# Altium PCB Embarcado.PcbDoc (part 1 of 2)
Units mm, origin at the board's own origin, x right, y up, seen from the top; angles counter-clockwise.
Board outline 64.52 x 71.25 mm, 2 copper layers (Top Layer, Bottom Layer); 37 components, 40 nets, 204 pads, 24 vias.
Unrouted connection lines stored in the file: 4.
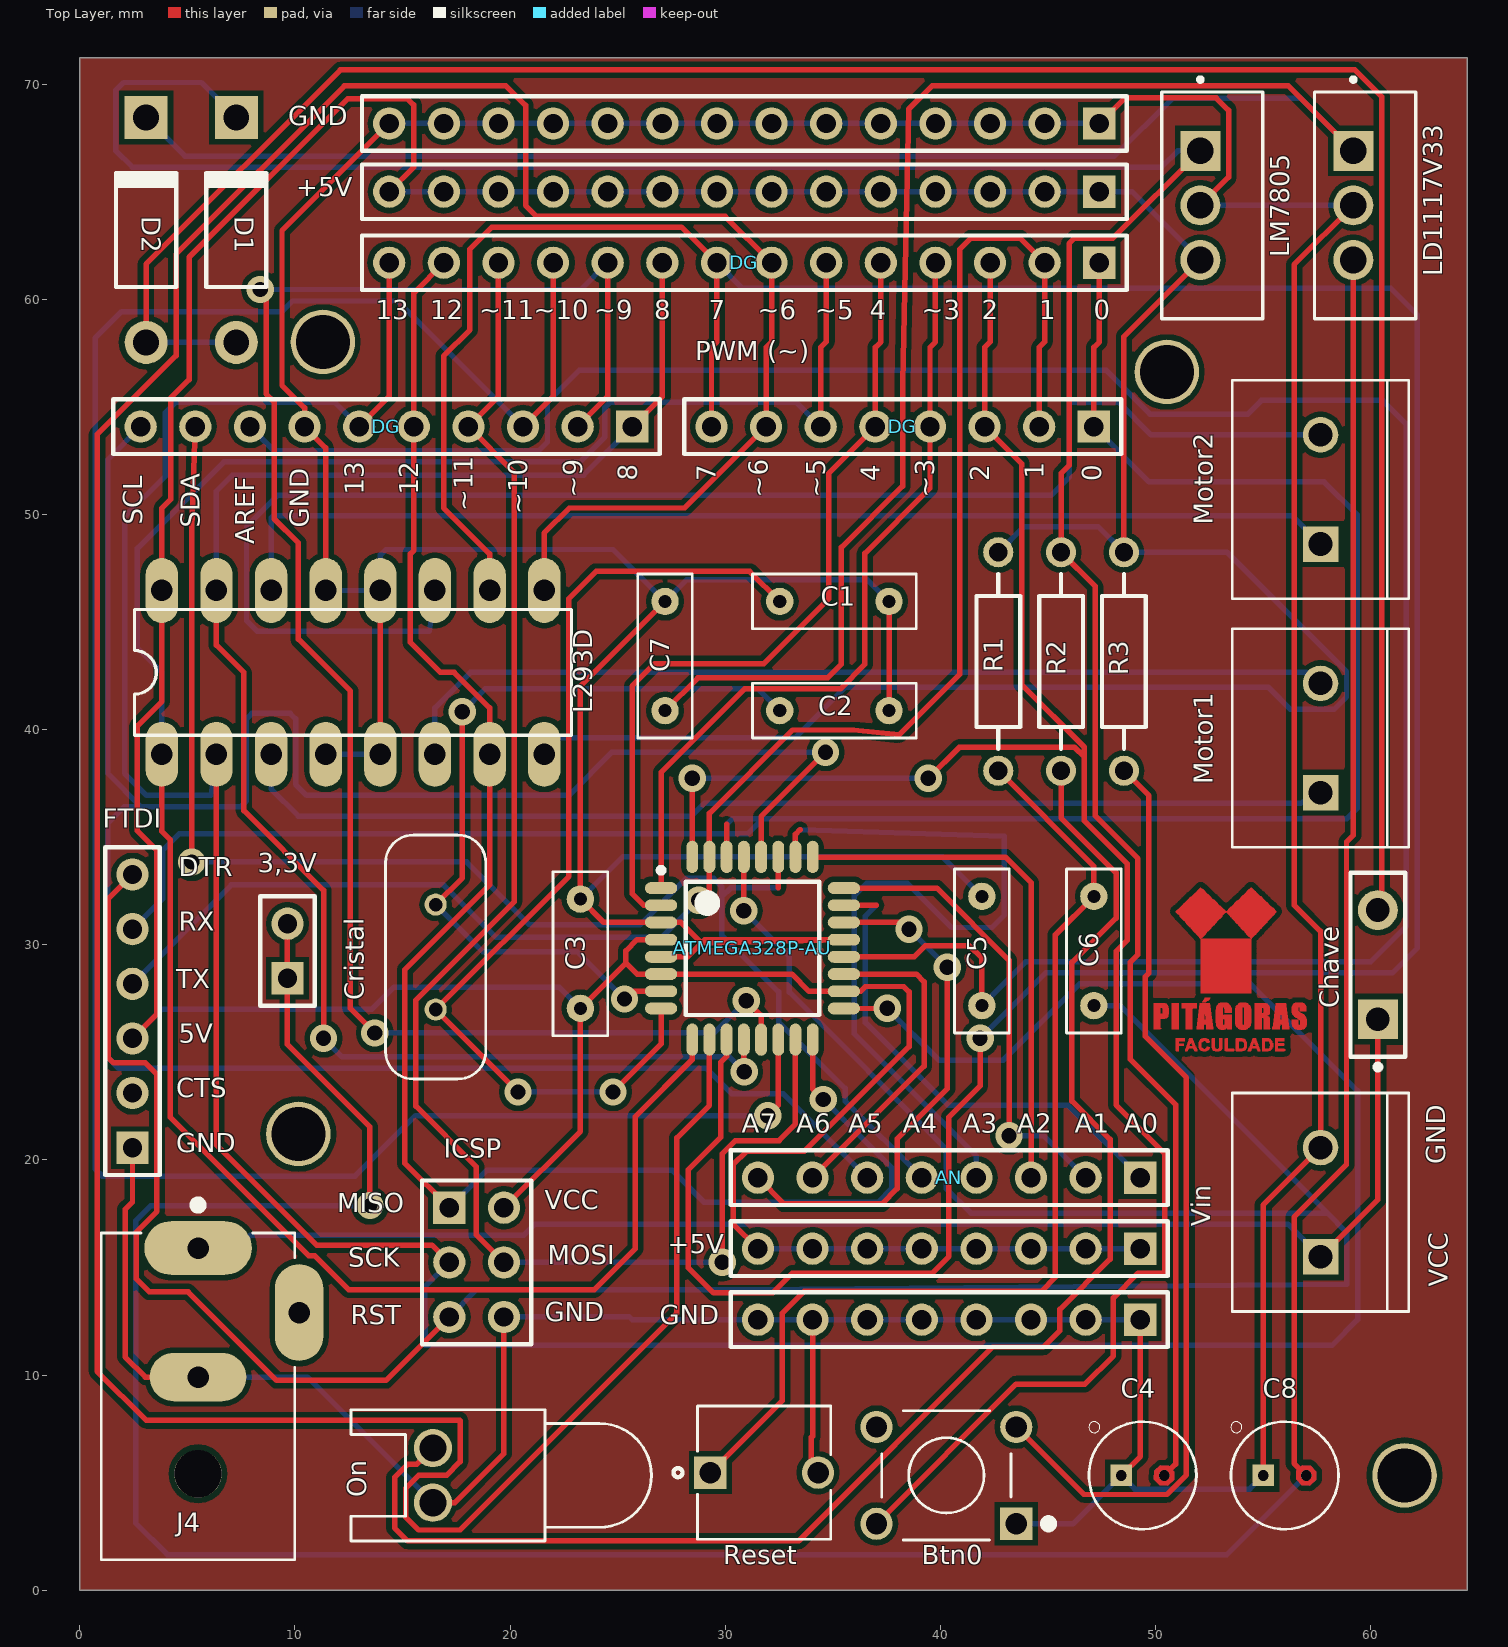
[diagram p0: Top Layer view]
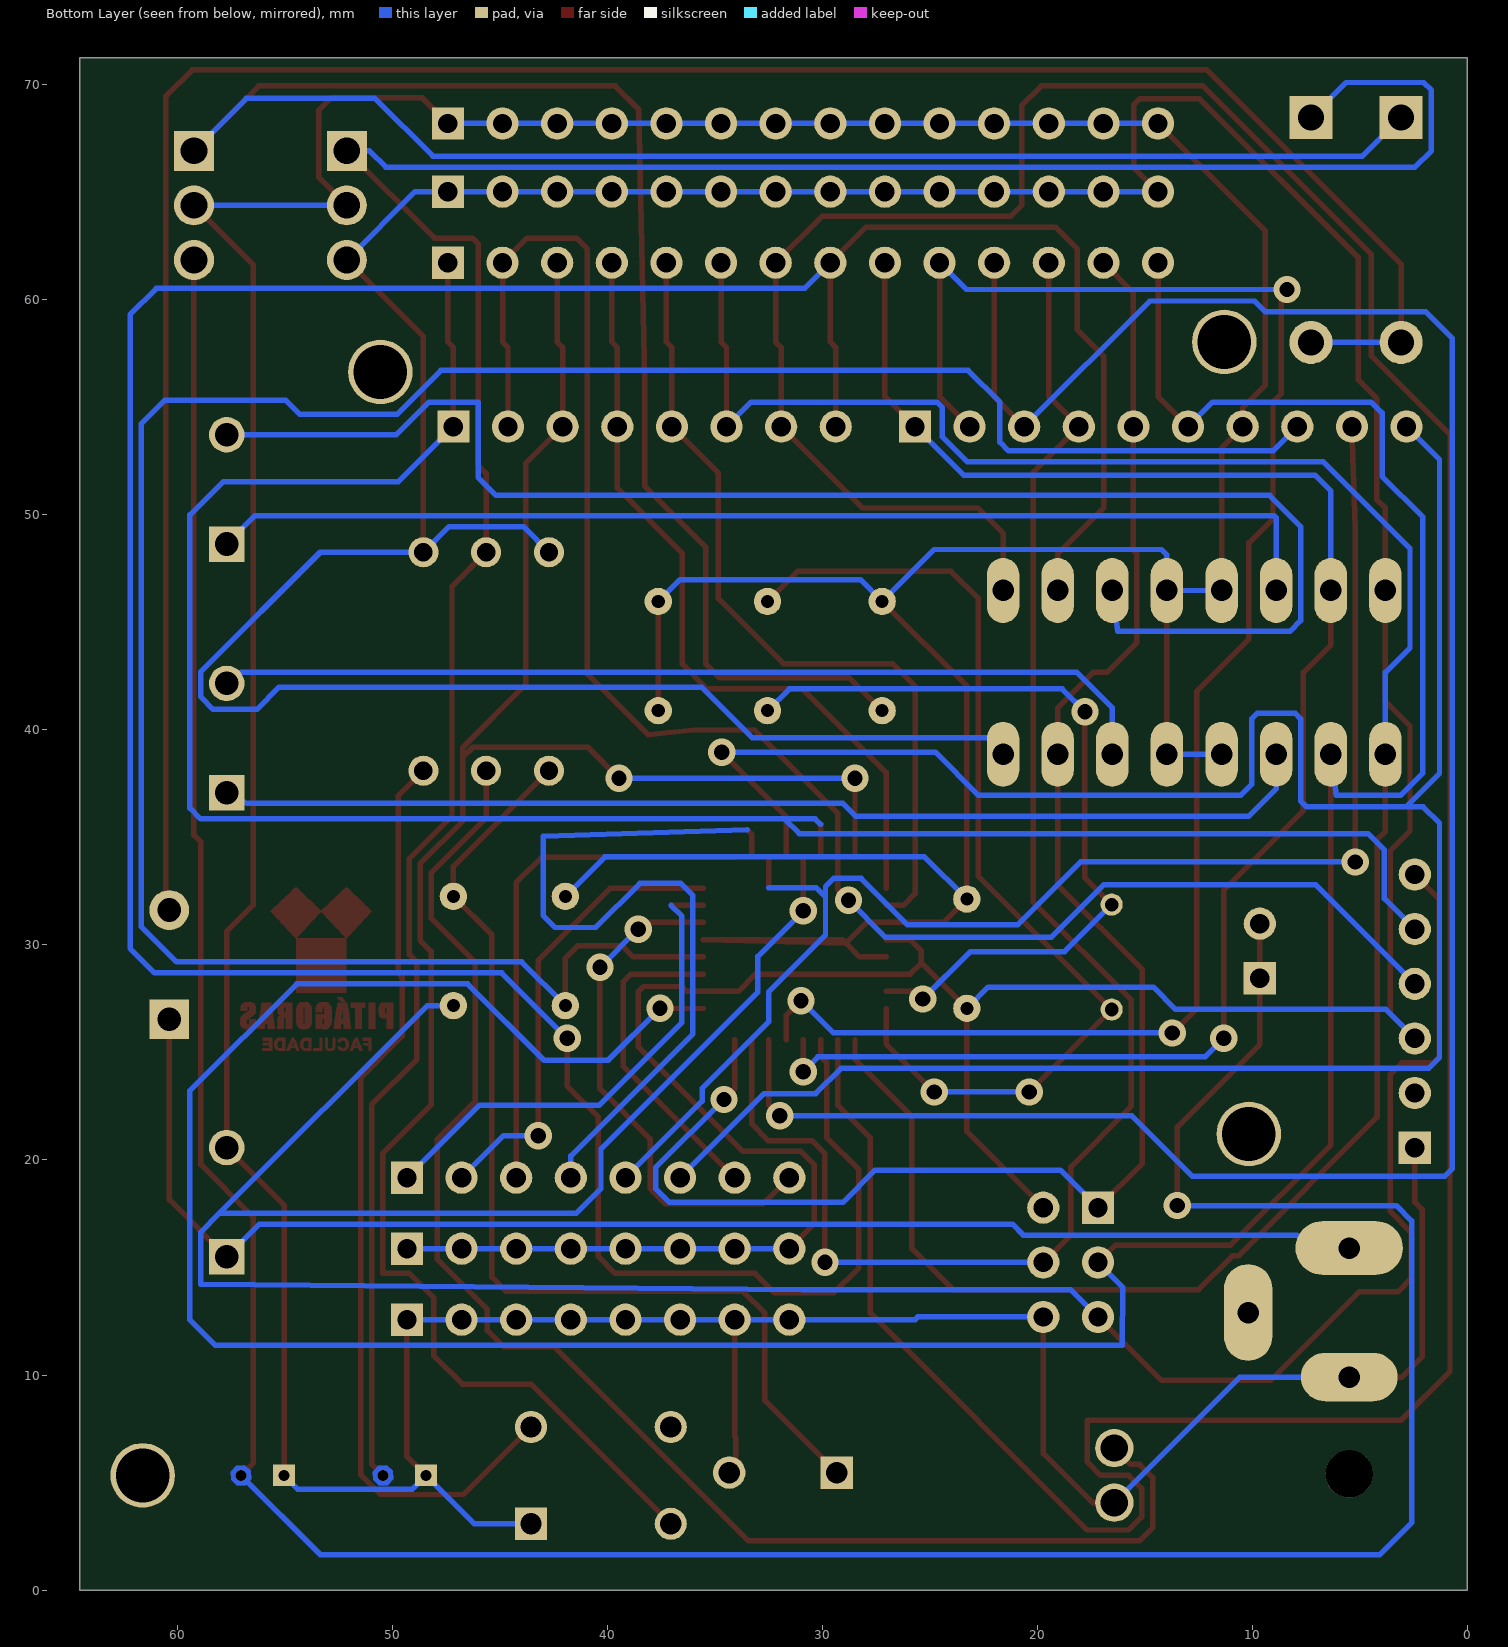
[diagram p1: Bottom Layer view, seen from below]

## Layer stack, top to bottom
Top Solder: solder mask 0.0102, Solder Resist, Dk 3.5
Top Layer: signal copper 0.0356
Dielectric 1: dielectric 0.32, FR-4, Dk 4.8
Bottom Layer: signal copper 0.0356
Bottom Solder: solder mask 0.0102, Solder Resist, Dk 3.5

## Board outline
0,0 64.516,0 64.516,71.247 0,71.247

## Design rules (kind name [scope] priority, off if disabled: settings)
Clearance [All] p1: gap=0.254 ignorepadtopadclearanceinfootprint=FALSE except(0: Arc-Hole Track-Hole SMDPad-Hole THPad-Hole Via-Hole Fill-Hole Poly-Hole Region-Hole Text-Hole)
PolygonConnect [All] p1: connectstyle=Relief reliefconductorwidth=0.254 reliefentries=4 polygonreliefangle="90 Angle" airgapwidth=0.254
RoomDefinition Embarcado [InComponentClass('Embarcado')] p1: confinementstyle=ConfineIn formatcopy=TRUE lockcomponents=FALSE outline 0.032,0.127 64.548,0.127 64.548,71.374 0.032,71.374
RoutingVias [All] p1: holewidth=0.711 width=1.27 viastyle="Through Hole" minholewidth=0.711 minwidth=1.27 maxholewidth=0.711 maxwidth=1.27
SolderMaskExpansion [All] p1: expansion=0.102
Width [All] p1: maxlimit=0.254 minlimit=0.254 preferedwidth=0.254
30 further rules are at their usual default settings.

## Components (designator, comment, footprint, x,y, rotation, side; value= is the part's Value field where it differs from the comment)
3,3V "" HDR1X2 9.652,28.448 r90 top
+5V "+5V" HDR1X8 49.308,15.875 r180 top
+5V "+5V" HDR1X14 47.403,65.024 r180 top
AN "Analógico" HDR1X8 49.308,19.177 r180 top
ATMEGA328P-AU "PROCESSADOR" TQFP80P900X900X120-32N 31.274,29.845 r0 top (schematic designator U?)
Btn0 "" SW_FSM8JH 40.291,5.334 r180 top
C1 "" LEADED_DECOUPLING_CAP(.1) 35.084,45.974 r0 top
C2 "" LEADED_DECOUPLING_CAP(.1) 35.084,40.894 r0 top
C3 "" LEADED_DECOUPLING_CAP(.1) 23.273,29.591 r90 top
C4 "" CAPPRD200W50D500H1100B_ECA-1HM220(Primary) 49.419,5.334 r0 top
C5 "" LEADED_DECOUPLING_CAP(.1) 41.942,29.718 r90 top
C6 "" LEADED_DECOUPLING_CAP(.1) 47.149,29.718 r90 top
C7 "" LEADED_DECOUPLING_CAP(.1) 27.21,43.434 r90 top
C8 "" CAPPRD200W50D500H1100B_ECA-1HM220(Primary) 56.023,5.334 r0 top
Chave "" SPST-2 60.357,29.083 r90 top (schematic designator Key)
Cristal "ECS-60-32-4XDN" XTAL_ECS-60-32-4XDN 16.542,29.437 r90 top (schematic designator Crystal)
D1 "Diode 1N4007" DO-41 7.271,63.246 r90 top
D2 "Diode 1N4007" DO-41 3.08,63.246 r90 top
DG "DG" HDR1X14 47.403,61.722 r180 top
DG "Digitais" HDR1X8 47.149,54.102 r180 top
DG "Digitais" HDR1X10 25.686,54.102 r180 top
FTDI "" HDR1X6 2.445,20.574 r90 top
GND "GND" HDR1X14 47.403,68.199 r180 top
GND "GND" HDR1X8 49.308,12.573 r180 top
ICSP "" HDR2X3_CEN 17.177,17.78 r270 top
J4 "PJ-058BH" CUI_PJ-058BH 5.493,15.906 r270 top
L293D "" DIL16 12.7,42.672 r0 top
LD1117V33 "" TO254P1054X470X2600-3 59.214,66.929 r270 top
LM7805 "LM7805CT/NOPB" TO254P1054X470X2600-3 52.102,66.929 r270 top
Motor1 "282837\-2" TE_282837-2 57.69,39.624 r90 top
Motor2 "282837\-2" TE_282837-2 57.69,51.181 r90 top
On "LED" LED-0 16.415,5.334 r90 top
R1 "" AXIAL-0.4 42.704,43.18 r90 top value=10K
R2 "" AXIAL-0.4 45.625,43.18 r90 top value=500R
R3 "" AXIAL-0.4 48.546,43.18 r90 top value=1K
Reset "4-1437565-0" SW_4-1437565-0 31.82,5.461 r0 top (schematic designator RESET)
Vin "282837\-2" TE_282837-2 57.69,18.034 r90 top

## Footprints (in the part's own frame and the unit in brackets; to place one, negate y for a bottom-side part, rotate by r counter-clockwise, add the part's x,y. Pads: shape width x height; smd on the part's side, far side on the other; paste and mask are expansions set on the pad)
AXIAL-0.4 [mm] "Axial Device, Thru-Hole; 2 Leads; 0.4 in Pin Spacing"
  round 1.4 hole 0.85: 1(-5.08,0) 2(5.08,0)
  silkscreen extent -4.06,-1.02 4.06,1.02
CAPPRD200W50D500H1100B_ECA-1HM220(Primary) [mm]
  rect 1.008x1.008 hole 0.5: NEG(-1,0)
  round 0.5 hole 0.5: POS(1,0)
  Top Layer region: 1.474,0.172 1.213,0.457 0.828,0.474 0.543,0.213 0.526,-0.172 0.787,-0.457 1.172,-0.474 1.457,-0.213
  Bottom Layer region: 1.474,0.172 1.213,0.457 0.828,0.474 0.543,0.213 0.526,-0.172 0.787,-0.457 1.172,-0.474 1.457,-0.213
  Multi-Layer region: 1.474,0.172 1.213,0.457 0.828,0.474 0.543,0.213 0.526,-0.172 0.787,-0.457 1.172,-0.474 1.457,-0.213
  silkscreen extent -2.5,-2.5 2.5,2.5
CUI_PJ-058BH [mm]
  oval 2.5x5 hole 1: 1(0,0)
  oval 2.25x4.5 hole 1: 2(6,0)
  oval 4.5x2.25 hole 1: 3(3,4.7)
  round 2.2 hole 2.2 unplated: None(10.5,0)
  silkscreen extent -2.2,-4.5 14.5,4.5
DIL16 [mm]
  oval 1.508x3.016 hole 1: 1(-8.89,-3.81) 2(-6.35,-3.81) 3(-3.81,-3.81) 4(-1.27,-3.81) 5(1.27,-3.81) 6(3.81,-3.81) 7(6.35,-3.81) 8(8.89,-3.81) 9(8.89,3.81) 10(6.35,3.81) 11(3.81,3.81) 12(1.27,3.81) 13(-1.27,3.81) 14(-3.81,3.81) 15(-6.35,3.81) 16(-8.89,3.81)
  silkscreen extent -10.16,-2.92 10.16,2.92
DO-41 [mm] "Diode, Axial; Body 5.2 x 2.7 mm (LxDia. max), Lead Dia. 0.86 mm (max)"
  round 2 hole 1.2: 1(-5.23,0)
  rect 2x2 hole 1.2: 2(5.23,0)
  silkscreen extent -2.65,-1.4 2.75,1.4
HDR1X2 [mm] "Connector; Header; 2 Position"
  rect 1.5x1.5 hole 0.9: 1(0,0)
  round 1.5 hole 0.9: 2(2.54,0)
  silkscreen extent -1.27,-1.27 3.81,1.27
HDR1X6 [mm] "Connector; Header; 6 Position"
  rect 1.5x1.5 hole 0.9: 1(0,0)
  round 1.5 hole 0.9: 2(2.54,0) 3(5.08,0) 4(7.62,0) 5(10.16,0) 6(12.7,0)
  silkscreen extent -1.27,-1.27 13.97,1.27
HDR1X8 [mm] "Connector; Header; 8 Position"
  rect 1.5x1.5 hole 0.9: 1(0,0)
  round 1.5 hole 0.9: 2(2.54,0) 3(5.08,0) 4(7.62,0) 5(10.16,0) 6(12.7,0) 7(15.24,0) 8(17.78,0)
  silkscreen extent -1.27,-1.27 19.05,1.27
HDR1X10 [mm] "Connector; Header; 10 Position"
  rect 1.5x1.5 hole 0.9: 1(0,0)
  round 1.5 hole 0.9: 2(2.54,0) 3(5.08,0) 4(7.62,0) 5(10.16,0) 6(12.7,0) 7(15.24,0) 8(17.78,0) 9(20.32,0) 10(22.86,0)
  silkscreen extent -1.27,-1.27 24.13,1.27
HDR1X14 [mm] "Connector; Header; 14 Position"
  rect 1.5x1.5 hole 0.9: 1(0,0)
  round 1.5 hole 0.9: 2(2.54,0) 3(5.08,0) 4(7.62,0) 5(10.16,0) 6(12.7,0) 7(15.24,0) 8(17.78,0) 9(20.32,0) 10(22.86,0) 11(25.4,0) 12(27.94,0) 13(30.48,0) 14(33.02,0)
  silkscreen extent -1.27,-1.27 34.29,1.27
HDR2X3_CEN [mm] "Connector; Header; 3x2 Position"
  rect 1.5x1.5 hole 0.9: 1(0,0)
  round 1.5 hole 0.9: 2(2.54,0) 3(5.08,0) 4(0,2.54) 5(2.54,2.54) 6(5.08,2.54)
  silkscreen extent -1.27,-1.27 6.35,3.81
LEADED_DECOUPLING_CAP(.1) [mil]
  round 50 hole 24: 1(-100,0) 2(100,0)
  silkscreen extent -150,-50 150,50
LED-0 [mil] "LED; 2 Leads"
  round 70 hole 50: 1(50,0) 2(-50,0)
  silkscreen extent -120,-400 120,150
SPST-2 [mm] "Switch; 2 Leads"
  rect 1.85x1.85 hole 1.1: 1(-2.54,0)
  round 1.85 hole 1.1: 2(2.54,0)
  silkscreen extent -4.89,-1.27 4.28,1.27
SW_4-1437565-0 [mm]
  rect 1.508x1.508 hole 1: 1(-2.502,0)
  round 1.508 hole 1: 2(2.502,0)
  silkscreen extent -4.22,-3.1 3.1,3.1
SW_FSM8JH [mm]
  rect 1.498x1.498 hole 0.99: 1(-3.25,2.25)
  round 1.498 hole 0.99: 2(-3.25,-2.25) 3(3.25,2.25) 4(3.25,-2.25)
  silkscreen extent -4.95,-3 3,3
TE_282837-2 [mm]
  rect 1.65x1.65 hole 1.1: 1(-2.54,0)
  round 1.65 hole 1.1: 2(2.54,0)
  silkscreen extent -5.08,-4.1 5.08,4.1
TO254P1054X470X2600-3 [mm]
  rect 1.86x1.86 hole 1.24: 1(0,0)
  round 1.86 hole 1.24: 2(2.54,0) 3(5.08,0)
  silkscreen extent -3.41,-1.8 7.81,2.9
TQFP80P900X900X120-32N [mm] "TQFP, 32-Leads, Body 7,00x7,00mm, Pitch 0,80mm, IPC Medium Density"
  oval 1.5x0.55 smd: 1(-4.25,2.8) 2(-4.25,2) 3(-4.25,1.2) 4(-4.25,0.4) 5(-4.25,-0.4) 6(-4.25,-1.2) 7(-4.25,-2) 8(-4.25,-2.8) 17(4.25,-2.8) 18(4.25,-2) 19(4.25,-1.2) 20(4.25,-0.4) 21(4.25,0.4) 22(4.25,1.2) 23(4.25,2) 24(4.25,2.8)
  oval 0.55x1.5 smd: 9(-2.8,-4.25) 10(-2,-4.25) 11(-1.2,-4.25) 12(-0.4,-4.25) 13(0.4,-4.25) 14(1.2,-4.25) 15(2,-4.25) 16(2.8,-4.25) 25(2.8,4.25) 26(2,4.25) 27(1.2,4.25) 28(0.4,4.25) 29(-0.4,4.25) 30(-1.2,4.25) 31(-2,4.25) 32(-2.8,4.25)
  silkscreen extent -4.37,-3.1 3.1,3.75, body extent -3.5,-3.5 3.5,3.5, height 1.2
XTAL_ECS-60-32-4XDN [mm]
  round 1.03 hole 0.63: 1(-2.44,0) 2(2.44,0)
  silkscreen extent -5.68,-2.33 5.68,2.33

## Part data
3,3V: library part "Header 2", "Header, 2-Pin", LatestRevisionDate=17-Jul-2002, LatestRevisionNote="Re-released for DXP Platform.", Publisher="Altium Limited"
+5V AN DG GND: library part "Header 8", "Header, 8-Pin", LatestRevisionDate=17-Jul-2002, LatestRevisionNote="Re-released for DXP Platform.", Publisher="Altium Limited"
+5V DG GND: library part "Header 14", "Header, 14-Pin", LatestRevisionDate=17-Jul-2002, LatestRevisionNote="Re-released for DXP Platform.", Publisher="Altium Limited"
ATMEGA328P-AU: library part ATMEGA328P-AU, "ATMEGA328P-AU, 8 bit AVR Microcontrolador 20MHz 1kB, 32kB Flash, 2kB RAM. I2C 32-Pin TQFP", Datasheet URL=http://ww1.microchip.com/downloads/en/devicedoc/atmel-42735-8-bit-avr-microcontroller-atmega328-328p_datasheet.pdf
Btn0: library part FSM8JH, "Switch, Pushbutton, Tactile, SPST, Thru Hole, Vertical, 6MM, Black", Package=None, Availability=Unavailable, MF="TE Connectivity / Alcoswitch", MP=FSM8JH, Price=None, SnapEDA_Link=https://www.snapeda.com/parts/FSM8JH/TE%20Connectivity%20/%20Alcoswitch/view-part/?ref=snap
C1 C2 C3 C5 C6 C7: library part C320C104M1U5TA, "Capacitor; Ceramic; Cap .100uF; Tol 20%; Radial; Vol-Rtg 100V", Package="Radial Kemet", Availability=Unavailable, MF=KEMET, MP=C320C104M1U5TA, Price=None, SnapEDA_Link=https://www.snapeda.com/parts/C320C104M1U5TA/KEMET/view-part/?ref=snap
C4 C8: library part ECA-1HM220, "Cap Aluminum 22uF 50V 20% _5 X 11mm_ Radial Aluminum Cylindrical Can 2mm 100mA 2000 hr 85°C Bulk", Package=None, Availability=Unavailable, MF=Panasonic, MP=ECA1HM220, Price=None, SnapEDA_Link=https://www.snapeda.com/parts/ECA1HM220/Panasonic/view-part/?ref=snap
Chave: library part SW-SPST, "Single-Pole, Single-Throw Switch", LatestRevisionDate=17-Jul-2002, LatestRevisionNote="Re-released for DXP Platform.", PackageDescription="Switch; 2 Leads", PackageReference=SPST-2, Published=24-Mar-1999, Publisher="Altium Limited"
Cristal: "Crystal 6.0000mhz 32pf t/h", Package="HC-49/US ECS International", Availability=Unavailable, MF="ECS Inc.", MP=ECS-60-32-4XDN, Price=None, SnapEDA_Link=https://www.snapeda.com/parts/ECS-60-32-4XDN/ECS%20Inc./view-part/?ref=snap
D1 D2: "1 Amp General Purpose Rectifier", Code_JEDEC=DO-204-AL, ComponentLink1Description="Manufacturer Link", ComponentLink1URL=http://www.fairchildsemi.com/, ComponentLink2Description=Datasheet, ComponentLink2URL=http://www.fairchildsemi.com/ds/1N%2F1N4001.pdf, DatasheetVersion=1998, LatestRevisionDate=17-Jul-2002, LatestRevisionNote="Re-released for DXP Platform.", PackageDescription="Diode, Axial; Body 5.2 x 2.7 mm (LxDia. max), Lead Dia. 0.86 mm (max)", PackageReference=DO-41, PackageVersion=Aug-1999, Published=8-Jun-2000, Publisher="Altium Limited"
DG: library part "Header 10", "Header, 10-Pin", LatestRevisionDate=17-Jul-2002, LatestRevisionNote="Re-released for DXP Platform.", Publisher="Altium Limited"
FTDI: library part "Header 6", "Header, 6-Pin", LatestRevisionDate=17-Jul-2002, LatestRevisionNote="Re-released for DXP Platform.", Publisher="Altium Limited"
ICSP: library part "Header 3X2A", "Header, 3-Pin, Dual row", LatestRevisionDate=17-Jul-2002, LatestRevisionNote="Re-released for DXP Platform.", Publisher="Altium Limited"
L293D: library part L293D, Package="Package Analog Devices", Availability=Unavailable, MF=STMicroelectronics, MP=L293D, Price=None, SnapEDA_Link=https://www.snapeda.com/parts/L293D/STMicroelectronics/view-part/?ref=snap
LD1117V33: library part LM7805CT/NOPB, Package="TO-220 ON Semiconductor", Availability=Unavailable, MF="ON Semiconductor", MP=LM7805CT, Price=None, SnapEDA_Link=https://www.snapeda.com/parts/LM7805CT/ON%20Semiconductor/view-part/?ref=snap
LM7805: Package="TO-220 ON Semiconductor", Availability=Unavailable, MF="ON Semiconductor", MP=LM7805CT, Price=None, SnapEDA_Link=https://www.snapeda.com/parts/LM7805CT/ON%20Semiconductor/view-part/?ref=snap
Motor1 Motor2 Vin: library part 282837-2, "Connector Terminal Blocks Receptacle 2 Position 5.08mm Solder Straight Thru-Hole 13.5A/Contact", Package=None, Availability=Unavailable, EU_RoHS_Compliance="Compliant with Exemptions", Link=http://www.te.com/usa-en/product-282837-2.html, MF="TE Connectivity", MP=282837-2, Price=None, SnapEDA_Link=https://www.snapeda.com/parts/282837-2/TE%20Connectivity%20AMP%20Connectors/view-part/?ref=snap
On: library part LED0, "Typical INFRARED GaAs LED", LatestRevisionDate=08-Jul-2005, LatestRevisionNote="Mech Layer 1 removed.", PackageDescription="LED; 2 Leads", PackageReference=LED-0, Published=8-Jun-2000, Publisher="Altium Limited"
R1 R2 R3: library part Res2, "Resistor", LatestRevisionDate=17-Jul-2002, LatestRevisionNote="Re-released for DXP Platform.", PackageDescription="Axial Device, Thru-Hole; 2 Leads; 0.4 in Pin Spacing", PackageReference=AXIAL-0.4, Published=8-Jun-2000, Publisher="Altium Limited"
Reset: "features, series, Tactile / Jog, circuitry, voltage, illumination, operation, tactile, style, Pushbutton, Industrial ...", Package=None, Availability=Unavailable, MF="TE Connectivity", MP=FSM4JRT, Price=None, SnapEDA_Link=https://www.snapeda.com/parts/FSM4JRT/TE%20Connectivity%20ALCOSWITCH%20Switches/view-part/?ref=snap

## Free pads (board coordinates)
  round 3 hole 2.5: 4(10.16,21.209) 7(61.595,5.334) 8(50.546,56.642) 9(11.303,58.039)

## Via types
v1: diameter 1.27, hole 0.711, Top Layer to Bottom Layer, 24 vias

## Nets (pads, with @x,y where several pads share a name; then routed paths per layer and width w, separated by ;. In a path a pad name is that pad's centre, name@x,y a point inside that pad or via, vN(x,y) a via of type N, cw(c..) or ccw(c..) an arc to the next point about the centre after c; other vN are vias at no path point)
+3,3: 3,3V.1 3,3V.2 C8.POS LD1117V33.3 | length 154.4
  Top Layer w0.254: 9.652,30.988 9.652,28.448 9.652,25.375 13.487,21.539 v1(13.487,17.882) ; C8.POS@57.023,5.334 56.464,5.893 56.464,17.348 58.896,19.78 58.896,34.791 59.214,35.109 LD1117V33.3@59.214,61.849
  Bottom Layer w0.254: v1(13.487,17.882) 3.302,17.882 2.591,17.17 2.591,3.124 4.064,1.651 53.34,1.651 C8.POS@57.023,5.334
+5: +5V.1 +5V.2 +5V.3 +5V.4 +5V.5 +5V.6 +5V.7 +5V.8 +5V.9 +5V.10 +5V.11 +5V.12 +5V.13 +5V.14 ATMEGA328P-AU.4 ATMEGA328P-AU.6 ATMEGA328P-AU.18 C3.1 FTDI.3 ICSP.4 L293D.8 L293D.16 LM7805.3 R1.2 R3.2 | length 258.2
  Top Layer w0.254: FTDI.3@2.445,25.654 3.581,26.79 3.581,34.392 2.667,35.306 2.667,40.183 3.81,41.326 L293D.16@3.81,46.482 3.81,50.317 4.216,50.724 4.216,55.426 5.081,56.291 5.081,61.977 12.446,69.342 15.24,69.342 15.519,69.063 15.519,66.16 +5V.14@14.383,65.024 ; ICSP.4@19.717,17.78 23.273,21.336 C3.1@23.273,27.051 25.387,29.166 ; ATMEGA328P-AU.4@27.024,30.245 25.908,30.245 25.387,29.724 25.387,29.166 ; +5V.8@31.528,15.875 30.378,17.025 30.378,19.787 30.988,20.396 33.68,20.396 38.557,25.273 38.557,27.813 38.303,28.067 36.525,28.067 36.303,27.845 ATMEGA328P-AU.18@35.524,27.845 33.902,27.845 33.102,28.645 ATMEGA328P-AU.6@27.024,28.645 25.908,28.645 25.387,29.166 ; R3.2@48.546,48.26 48.546,58.293 LM7805.3@52.102,61.849
  Bottom Layer w0.254: FTDI.3@2.445,25.654 3.791,27 13.564,27 14.605,28.042 22.282,28.042 C3.1@23.273,27.051 ; +5V.14@14.383,65.024 +5V.13@16.923,65.024 +5V.12@19.463,65.024 +5V.11@22.003,65.024 +5V.10@24.543,65.024 +5V.9@27.083,65.024 +5V.8@29.623,65.024 +5V.7@32.163,65.024 +5V.6@34.703,65.024 +5V.5@37.243,65.024 +5V.4@39.783,65.024 +5V.3@42.323,65.024 +5V.2@44.863,65.024 +5V.1@47.403,65.024 48.927,65.024 LM7805.3@52.102,61.849 ; L293D.8@21.59,38.862 21.59,39.624 33.249,39.624 35.611,41.986 55.258,41.986 56.286,40.958 58.325,40.958 58.896,41.529 58.896,42.704 53.34,48.26 R3.2@48.546,48.26 47.352,49.454 43.898,49.454 R1.2@42.704,48.26 ; +5V.8@31.528,15.875 +5V.7@34.068,15.875 +5V.6@36.608,15.875 +5V.5@39.148,15.875 +5V.4@41.688,15.875 +5V.3@44.228,15.875 +5V.2@46.768,15.875 +5V.1@49.308,15.875
GND: ATMEGA328P-AU.3 ATMEGA328P-AU.5 ATMEGA328P-AU.21 Btn0.1 C1.2 C2.2 C3.2 C4.NEG C5.2 C7.2 C8.NEG DG.7@10.446,54.102 FTDI.1 GND.1 GND.2 GND.3 GND.4 GND.5 GND.6 GND.7 GND.8 GND.9 GND.10 GND.11 GND.12 GND.13 GND.14 ICSP.6 J4.2 L293D.4 L293D.5 L293D.12 L293D.13 LD1117V33.2 LM7805.2 On.2 Reset.2 Vin.2 | length 336
  Top Layer w0.254: FTDI.1@2.445,20.574 2.445,18.045 2.104,17.704 2.104,10.85 3.048,9.906 J4.2@5.493,9.906 ; L293D.13@11.43,46.482 11.43,53.118 DG.7@10.446,54.102 10.446,54.973 9.398,56.021 9.398,63.214 GND.14@14.383,68.199 ; L293D.5@13.97,38.862 L293D.12@13.97,46.482 ; On.2@16.415,4.064 17.431,4.064 19.717,6.35 ICSP.6@19.717,12.7 ; ATMEGA328P-AU.5@27.024,29.445 28.258,29.445 28.899,30.086 ; C7.2@27.21,45.974 23.273,42.037 C3.2@23.273,32.131 24.359,31.045 ATMEGA328P-AU.3@27.024,31.045 27.94,31.045 28.899,30.086 ; GND.7@34.068,12.573 34.068,7.161 34.011,7.104 34.011,5.772 Reset.2@34.322,5.461 ; C2.2@37.624,40.894 C1.2@37.624,45.974 ; GND.1@47.403,68.199 48.597,69.393 52.832,69.393 53.416,68.809 53.416,65.703 LM7805.2@52.102,64.389 ; C4.NEG@48.419,5.334 49.308,6.223 GND.1@49.308,12.573 ; C8.NEG@55.023,5.334 55.023,17.907 Vin.2@57.69,20.574 57.69,30.626 56.464,31.852 56.464,61.639 LD1117V33.2@59.214,64.389 ; 28.899,30.086 ATMEGA328P-AU.21@35.524,30.245 29.058,30.245 28.899,30.086
  Bottom Layer w0.254: J4.2@5.493,9.906 10.573,9.906 On.2@16.415,4.064 ; L293D.4@11.43,38.862 L293D.5@13.97,38.862 ; L293D.13@11.43,46.482 L293D.12@13.97,46.482 13.97,48.133 14.224,48.387 24.797,48.387 C7.2@27.21,45.974 28.226,46.99 36.608,46.99 C1.2@37.624,45.974 ; GND.14@14.383,68.199 GND.13@16.923,68.199 GND.12@19.463,68.199 GND.11@22.003,68.199 GND.10@24.543,68.199 GND.9@27.083,68.199 GND.8@29.623,68.199 GND.7@32.163,68.199 GND.6@34.703,68.199 GND.5@37.243,68.199 GND.4@39.783,68.199 GND.3@42.323,68.199 GND.2@44.863,68.199 GND.1@47.403,68.199 ; ICSP.6@19.717,12.7 25.552,12.7 25.679,12.573 GND.8@31.528,12.573 GND.7@34.068,12.573 GND.6@36.608,12.573 GND.5@39.148,12.573 GND.4@41.688,12.573 GND.3@44.228,12.573 GND.2@46.768,12.573 GND.1@49.308,12.573 ; C3.2@23.273,32.131 25.242,34.1 40.1,34.1 C5.2@41.942,32.258 ; Btn0.1@43.541,3.084 46.169,3.084 C4.NEG@48.419,5.334 49.054,4.699 54.388,4.699 C8.NEG@55.023,5.334 ; LM7805.2@52.102,64.389 LD1117V33.2@59.214,64.389
NetAN_1: AN.1 ATMEGA328P-AU.23 | length 22.9
  Top Layer w0.254: ATMEGA328P-AU.23@35.524,31.845 37.027,31.845
  Bottom Layer w0.254: 37.027,31.845 36.525,31.344 36.525,26.392 40.362,22.555 45.93,22.555 AN.1@49.308,19.177
NetAN_2: AN.2 ATMEGA328P-AU.24 | length 21.6
  Top Layer w0.254: ATMEGA328P-AU.24@35.524,32.645 39.847,32.645 43.205,29.286 v1(43.205,21.133)
  Bottom Layer w0.254: v1(43.205,21.133) 44.812,21.133 AN.2@46.768,19.177
NetAN_3: AN.3 ATMEGA328P-AU.25 | length 24.4
  Top Layer w0.254: ATMEGA328P-AU.25@34.074,34.095 34.074,34.087 43.034,34.087 44.228,32.893 AN.3@44.228,19.177
NetAN_4: AN.4 ATMEGA328P-AU.26 | length 38.3
  Top Layer w0.254: ATMEGA328P-AU.26@33.274,34.095 33.274,35.14 33.491,35.357
  Bottom Layer w0.254: 33.491,35.357 42.977,35.052 42.977,31.369 42.418,30.81 40.538,30.81 38.481,32.868 36.576,32.868 36.017,32.309 36.017,25.859 41.688,20.188 AN.4@41.688,19.177
NetAN_5: AN.5 ATMEGA328P-AU.27 DG.9@5.366,54.102 | length 68.8
  Top Layer w0.254: v1(5.207,33.858) 5.207,49.403 DG.9@5.366,54.102 ; 32.474,32.652 ATMEGA328P-AU.27@32.474,34.095
  Bottom Layer w0.254: v1(5.207,33.858) 17.988,33.858 20.909,30.937 26.035,30.937 28.194,33.096 29.464,33.096 29.845,32.715 29.845,32.233 ; 32.474,32.652 30.264,32.652 29.845,32.233 ; AN.5@39.148,19.177 35.585,22.74 35.585,23.329 32.487,26.427 32.487,27.813 29.845,30.455 29.845,32.233
NetAN_6: AN.6 ATMEGA328P-AU.28 DG.10@2.826,54.102 | length 115.5
  Top Layer w0.254: ATMEGA328P-AU.28@31.674,34.095 31.674,35.967 v1(34.671,38.964)
  Bottom Layer w0.254: DG.10@2.826,54.102 1.295,52.571 1.295,37.973 2.845,36.424 ; v1(34.671,38.964) 24.74,38.964 22.733,36.957 10.541,36.957 10.033,37.465 10.033,40.513 9.779,40.767 8.001,40.767 7.747,40.513 7.747,36.703 7.468,36.424 2.845,36.424 ; AN.6@36.608,19.177 32.696,23.089 30.302,23.089 29.134,24.257 1.803,24.257 1.295,24.765 1.295,35.662 2.057,36.424 2.845,36.424
NetAN_7: AN.7 ATMEGA328P-AU.19 | length 15.1
  Top Layer w0.254: AN.7@34.068,19.177 39.256,24.365 39.256,28.284 38.895,28.645 ATMEGA328P-AU.19@35.524,28.645
NetAN_8: AN.8 ATMEGA328P-AU.22 | length 24.2
  Top Layer w0.254: AN.8@31.528,19.177 32.747,17.958 37.287,17.958 37.998,18.669 37.998,20.98 40.335,23.317 v1(40.335,28.956) ; ATMEGA328P-AU.22@35.524,31.045 38.246,31.045 v1(38.557,30.734)
  Bottom Layer w0.254: v1(38.557,30.734) v1(40.335,28.956)
NetATMEGA328P-AU_1: ATMEGA328P-AU.1 DG.4@39.529,54.102 DG.4@39.783,61.722 | length 37
  Top Layer w0.254: ATMEGA328P-AU.1@27.024,32.645 27.026,32.645 27.026,38.024 30.912,41.91 35.357,41.91 36.5,43.053 36.5,48.209 39.529,51.238 DG.4@39.529,54.102 39.529,57.785 39.783,58.039 DG.4@39.783,61.722
NetATMEGA328P-AU_2: ATMEGA328P-AU.2 DG.5@36.989,54.102 DG.5@37.243,61.722 | length 38.7
  Top Layer w0.254: ATMEGA328P-AU.2@27.024,31.845 26.219,31.845 25.679,32.385 25.679,42.037 26.721,43.078 31.801,43.078 34.823,46.101 34.823,51.936 DG.5@36.989,54.102 36.989,57.785 37.243,58.039 DG.5@37.243,61.722
NetATMEGA328P-AU_7: ATMEGA328P-AU.7 C2.1 Cristal.2 | length 37.6
  Top Layer w0.254: Cristal.2@16.542,31.877 17.78,33.115 v1(17.78,40.843) ; v1(25.324,27.483) 25.686,27.845 ATMEGA328P-AU.7@27.024,27.845
  Bottom Layer w0.254: Cristal.2@16.542,31.877 18.726,29.693 23.114,29.693 v1(25.324,27.483) ; v1(17.78,40.843) 18.847,41.91 31.528,41.91 C2.1@32.544,40.894
NetATMEGA328P-AU_8: ATMEGA328P-AU.8 C1.1 Cristal.1 | length 47.2
  Top Layer w0.254: v1(20.374,23.165) Cristal.1@16.542,26.997 22.733,33.188 22.733,46.101 24.003,47.371 31.147,47.371 C1.1@32.544,45.974 ; v1(24.79,23.165) 27.024,25.398 ATMEGA328P-AU.8@27.024,27.045
  Bottom Layer w0.254: v1(20.374,23.165) v1(24.79,23.165)
NetATMEGA328P-AU_9: ATMEGA328P-AU.9 DG.6@34.449,54.102 DG.6@34.703,61.722 L293D.1 | length 107.2
  Top Layer w0.254: L293D.1@3.81,38.862 3.81,35.281 4.191,34.9 4.191,21.996 10.65,15.537 10.93,15.537 12.497,13.97 23.927,13.97 25.832,15.875 25.832,22.022 28.474,24.664 ATMEGA328P-AU.9@28.474,25.595 ; DG.6@34.449,54.102 34.449,57.785 34.703,58.039 DG.6@34.703,61.722
  Bottom Layer w0.254: L293D.1@3.81,38.862 3.81,42.672 2.667,43.815 2.667,48.438 6.692,52.463 23.253,52.463 24.409,53.619 24.409,54.991 24.663,55.245 33.306,55.245 DG.6@34.449,54.102
NetATMEGA328P-AU_10: ATMEGA328P-AU.10 DG.7@31.909,54.102 DG.7@32.163,61.722 L293D.9 | length 167.8
  Top Layer w0.254: L293D.9@21.59,46.482 21.59,49.149 22.758,50.317 28.124,50.317 DG.7@31.909,54.102 31.909,57.785 32.163,58.039 DG.7@32.163,61.722 30.004,63.881 21.234,63.881 20.726,64.389 20.726,69.037 19.812,69.952 12.294,69.952 4.47,62.128 4.47,57.404 0.806,53.74 0.806,10.167 3.073,7.899 17.66,7.899 17.685,7.874 17.685,5.969 17.05,5.334 15.748,5.334 15.145,4.731 15.145,3.397 15.748,2.794 17.678,2.794 27.762,12.878 27.762,21.032 29.274,22.544 ATMEGA328P-AU.10@29.274,25.595
NetATMEGA328P-AU_11: ATMEGA328P-AU.11 DG.8@29.369,54.102 DG.8@29.623,61.722 L293D.10 | length 158
  Top Layer w0.254: L293D.10@19.05,46.482 19.05,48.184 16.916,50.317 16.916,57.379 18.136,58.598 18.136,62.357 19.152,63.373 27.972,63.373 DG.8@29.623,61.722 29.623,58.039 29.369,57.785 DG.8@29.369,54.102 ; ATMEGA328P-AU.11@30.074,25.595 30.074,24.816 29.794,24.536 29.794,21.057 28.296,19.558 28.296,14.986 29.464,13.818 32.207,13.818 33.122,14.732 39.624,14.732 40.411,15.519 40.411,21.996 41.859,23.444 v1(41.859,25.654)
  Bottom Layer w0.254: DG.8@29.623,61.722 30.817,60.528 60.96,60.528 62.179,59.309 62.179,29.845 61.036,28.702 44.907,28.702 v1(41.859,25.654)
NetATMEGA328P-AU_12: ATMEGA328P-AU.12 DG.1@25.686,54.102 DG.9@27.083,61.722 L293D.15 | length 78
  Top Layer w0.254: L293D.15@6.35,46.482 6.35,43.942 7.62,42.672 7.62,36.246 11.328,32.537 v1(11.328,25.654) ; DG.1@25.686,54.102 27.083,55.499 DG.9@27.083,61.722 ; ATMEGA328P-AU.12@30.874,25.595 30.874,24.117 v1(30.886,24.105)
  Bottom Layer w0.254: L293D.15@6.35,46.482 6.35,51.105 7.087,51.841 23.425,51.841 DG.1@25.686,54.102 ; v1(11.328,25.654) 12.192,24.79 30.201,24.79 v1(30.886,24.105)
NetATMEGA328P-AU_13: ATMEGA328P-AU.13 DG.2@23.146,54.102 DG.10@24.543,61.722 | length 81.6
  Top Layer w0.254: v1(8.382,60.477) 8.661,60.198 8.661,55.621 9.037,55.245 9.037,49.815 10.16,48.692 10.16,44.221 12.573,41.808 12.573,27.051 v1(13.716,25.908) ; DG.2@23.146,54.102 24.543,55.499 DG.10@24.543,61.722 ; v1(30.986,27.409) 31.674,26.721 ATMEGA328P-AU.13@31.674,25.595
  Bottom Layer w0.254: v1(8.382,60.477) 23.298,60.477 DG.10@24.543,61.722 ; v1(13.716,25.908) 29.485,25.908 v1(30.986,27.409)
NetATMEGA328P-AU_14: ATMEGA328P-AU.14 DG.3@20.606,54.102 DG.11 | length 106.2
  Top Layer w0.254: DG.3@20.606,54.102 22.003,55.499 DG.11@22.003,61.722 ; v1(31.979,22.06) 32.474,22.555 ATMEGA328P-AU.14@32.474,25.595
  Bottom Layer w0.254: DG.3@20.606,54.102 14.764,59.944 9.893,59.944 9.398,59.449 1.944,59.449 0.711,58.217 0.711,19.583 1.041,19.253 12.802,19.253 15.608,22.06 v1(31.979,22.06)
NetATMEGA328P-AU_15: ATMEGA328P-AU.15 DG.4@18.066,54.102 DG.12 ICSP.5 | length 74.6
  Top Layer w0.254: DG.12@19.463,61.722 19.463,55.499 DG.4@18.066,54.102 20.193,51.975 20.193,32.004 15.621,27.432 15.621,22.504 18.44,19.685 18.44,16.517 ICSP.5@19.717,15.24 ; v1(29.87,15.24) 29.87,20.295 30.48,20.904 32.512,20.904 33.274,21.666 ATMEGA328P-AU.15@33.274,25.595
  Bottom Layer w0.254: ICSP.5@19.717,15.24 v1(29.87,15.24)
NetATMEGA328P-AU_16: ATMEGA328P-AU.16 DG.5@15.526,54.102 DG.13 ICSP.1 L293D.7 | length 79.6
  Top Layer w0.254: DG.13@16.923,61.722 15.526,60.325 DG.5@15.526,54.102 15.526,48.343 15.367,48.184 15.367,44.069 16.764,42.672 17.399,42.672 19.05,41.021 L293D.7@19.05,38.862 19.05,32.791 15.113,28.854 15.113,19.844 ICSP.1@17.177,17.78 ; ATMEGA328P-AU.16@34.074,25.595 34.074,23.31 v1(34.569,22.815)
  Bottom Layer w0.254: ICSP.1@17.177,17.78 18.93,19.533 27.534,19.533 29.032,18.034 37.109,18.034 37.744,18.669 37.744,19.64 v1(34.569,22.815)
NetATMEGA328P-AU_17: ATMEGA328P-AU.17 DG.6@12.986,54.102 DG.14 ICSP.2 L293D.2 | length 160.3
  Top Layer w0.254: L293D.2@6.35,38.862 6.35,20.701 11.006,16.045 16.372,16.045 ICSP.2@17.177,15.24 ; DG.6@12.986,54.102 14.383,55.499 DG.14@14.383,61.722 ; ATMEGA328P-AU.17@35.524,27.045 37.535,27.045 v1(37.541,27.051)
  Bottom Layer w0.254: L293D.2@6.35,38.862 6.096,36.957 3.099,36.957 2.083,37.973 2.083,49.911 3.962,51.791 3.962,54.737 4.47,55.245 11.843,55.245 DG.6@12.986,54.102 ; ICSP.2@17.177,15.24 16.027,14.09 16.053,11.379 58.217,11.379 59.411,12.573 59.411,23.216 54.432,28.194 46.482,28.194 42.926,24.638 39.954,24.638 v1(37.541,27.051)
NetATMEGA328P-AU_20: ATMEGA328P-AU.20 C5.1 DG.8@7.906,54.102 | length 112.1
  Top Layer w0.254: ATMEGA328P-AU.20@35.524,29.445 38.792,29.445 39.319,29.972 41.351,29.972 41.942,29.381 C5.1@41.942,27.178
  Bottom Layer w0.254: DG.8@7.906,54.102 9.037,52.971 21.336,52.971 21.742,53.377 21.742,55.245 23.216,56.718 47.727,56.718 49.759,54.686 54.305,54.686 54.94,55.321 60.579,55.321 61.671,54.229 61.671,30.861 60.02,29.21 43.974,29.21 C5.1@41.942,27.178
NetATMEGA328P-AU_29: ATMEGA328P-AU.29 C6.1 FTDI.6 ICSP.3 | length 137.5
  Top Layer w0.254: FTDI.6@2.445,33.274 1.314,32.143 1.314,24.765 1.568,24.511 3.048,24.511 3.581,23.978 3.581,17.606 2.612,16.637 2.612,14.482 3.226,13.868 5.029,13.868 9.144,9.754 14.231,9.754 ICSP.3@17.177,12.7 ; v1(30.874,31.585) ATMEGA328P-AU.29@30.874,34.095
  Bottom Layer w0.254: ICSP.3@17.177,12.7 18.447,13.97 30.937,13.97 58.903,14.224 58.903,16.637 58.014,17.526 ; v1(30.874,31.585) 32.995,29.464 32.995,27.806 40.284,20.516 40.284,18.669 41.427,17.526 58.014,17.526 ; C6.1@47.149,27.178 48.362,27.178 58.014,17.526
NetATMEGA328P-AU_30: ATMEGA328P-AU.30 DG.1@47.149,54.102 DG.1@47.403,61.722 FTDI.5 | length 99.2
  Top Layer w0.254: ATMEGA328P-AU.30@30.074,34.095 30.074,35.61 ; DG.1@47.149,54.102 47.149,57.785 47.403,58.039 DG.1@47.403,61.722
  Bottom Layer w0.254: FTDI.5@2.445,30.734 3.861,32.15 3.861,34.417 4.623,35.179 31.064,35.179 31.75,35.865 ; 30.074,35.61 30.328,35.865 31.75,35.865 ; DG.1@47.149,54.102 49.714,51.537 57.861,51.537 59.404,49.994 59.404,36.366 58.903,35.865 31.75,35.865
NetATMEGA328P-AU_31: ATMEGA328P-AU.31 DG.2@44.609,54.102 DG.2@44.863,61.722 FTDI.4 | length 80.8
  Top Layer w0.254: v1(28.778,32.08) 29.274,32.576 ATMEGA328P-AU.31@29.274,34.095 29.274,36.123 33.146,39.994 35.975,39.994 38.1,39.776 40.919,42.596 40.919,62.357 41.427,62.865 43.72,62.865 DG.2@44.863,61.722 44.863,58.039 44.609,57.785 DG.2@44.609,54.102
  Bottom Layer w0.254: FTDI.4@2.445,28.194 7.042,32.791 16.916,32.791 19.355,30.353 27.051,30.353 v1(28.778,32.08)
NetATMEGA328P-AU_32: ATMEGA328P-AU.32 Btn0.3 DG.3@42.069,54.102 DG.3@42.323,61.722 | length 93.4
  Top Layer w0.254: ATMEGA328P-AU.32@28.474,34.095 v1(28.474,37.744) ; Btn0.3@37.041,3.084 43.533,9.576 46.736,9.576 48.057,10.897 48.057,13.589 49.212,14.744 50.439,14.744 50.439,20.308 48.184,22.563 48.184,29.705 48.692,30.213 48.692,33.782 46.706,35.768 46.706,38.735 ; v1(39.446,37.744) 40.894,39.192 46.249,39.192 46.706,38.735 ; DG.3@42.323,61.722 42.323,58.039 42.069,57.785 DG.3@42.069,54.102 43.79,52.381 43.79,42.109 46.706,39.192 46.706,38.735
  Bottom Layer w0.254: v1(28.474,37.744) v1(39.446,37.744)
NetBtn0_2: Btn0.2 R3.1 | length 43.7
  Top Layer w0.254: Btn0.2@43.541,7.584 46.68,4.445 50.546,4.445 51.455,5.354 51.455,23.831 49.53,25.756 49.53,28.511 49.708,28.689 49.708,36.938 R3.1@48.546,38.1
NetC4_POS: C4.POS D1.2 LM7805.1 R2.2 | length 128.3
  Top Layer w0.254: C4.POS@50.419,5.334 50.947,5.862 50.947,22.579 48.844,24.682 48.844,29.197 49.2,29.553 49.2,34.015 47.214,36.001 47.214,46.671 R2.2@45.625,48.26 45.625,51.924 45.999,52.299 45.999,62.611 46.253,62.865 48.038,62.865 LM7805.1@52.102,66.929
  Bottom Layer w0.254: D1.2@7.271,68.476 5.643,70.104 2.032,70.104 1.676,69.748 1.676,66.929 2.438,66.167 50.292,66.167 51.054,66.929 LM7805.1@52.102,66.929
NetC6_2: C6.2 R1.1 Reset.1 | length 48.3
  Top Layer w0.254: Reset.1@29.318,5.461 32.664,8.807 32.664,12.878 33.68,13.894 44.704,13.894 45.364,14.554 45.364,30.473 C6.2@47.149,32.258 47.149,33.655 R1.1@42.704,38.1
NetC7_1: C7.1 D2.2 LD1117V33.1 | length 117.5
  Top Layer w0.254: C7.1@27.21,40.894 28.734,42.418 34.773,42.418 35.408,43.053 35.408,48.489 38.252,51.333 38.252,56.159 38.532,68.859 39.624,69.952 56.191,69.952 LD1117V33.1@59.214,66.929
  Bottom Layer w0.254: D2.2@3.08,68.476 4.881,66.675 48.108,66.675 50.8,69.367 56.776,69.367 LD1117V33.1@59.214,66.929
NetChave_1: Chave.1 J4.1 Vin.1 | length 65.4
  Top Layer w0.254: Vin.1@57.69,15.494 60.357,18.161 Chave.1@60.357,26.543
  Bottom Layer w0.254: J4.1@5.493,15.906 7.321,15.906 7.925,16.51 20.65,16.51 21.158,17.018 56.166,17.018 Vin.1@57.69,15.494
NetChave_2: Chave.2 D1.1 D2.1 | length 107.4
  Top Layer w0.254: D2.1@3.08,58.016 3.08,61.652 12.116,70.688 59.284,70.688 60.528,69.444 60.528,31.794 Chave.2@60.357,31.623
  Bottom Layer w0.254: D2.1@3.08,58.016 D1.1@7.271,58.016
NetL293D_3: L293D.3 Motor1.1 | length 51.3
  Bottom Layer w0.254: L293D.3@8.89,38.862 8.89,37.262 10.16,35.992 28.448,35.992 29.046,36.59 56.761,36.59 Motor1.1@57.69,37.084
NetL293D_6: L293D.6 Motor1.2 | length 44.2
  Bottom Layer w0.254: L293D.6@16.51,38.862 16.51,41.021 18.161,42.672 57.024,42.672 Motor1.2@57.69,42.164
NetL293D_11: L293D.11 Motor2.2 | length 70
  Bottom Layer w0.254: L293D.11@16.51,46.482 16.256,44.577 8.255,44.577 7.747,45.085 7.747,49.454 9.195,50.902 45.161,50.902 45.999,51.74 45.999,55.245 48.285,55.245 49.809,53.721 Motor2.2@57.69,53.721
NetL293D_14: L293D.14 Motor2.1 | length 52.8
  Bottom Layer w0.254: L293D.14@8.89,46.482 8.89,49.86 8.992,49.962 56.369,49.962 Motor2.1@57.69,48.641
NetOn_1: On.1 R2.1 | length 69.6
  Top Layer w0.254: On.1@16.415,6.604 15.653,5.842 15.24,5.842 14.637,5.239 14.637,2.889 15.24,2.286 33.426,2.286 42.443,11.303 44.806,11.303 45.568,12.065 45.568,13.056 47.904,15.392 47.904,20.955 46.126,22.733 46.126,29.185 48.184,31.242 48.184,33.35 45.625,35.909 R2.1@45.625,38.1
pads on no net: Btn0.4 FTDI.2 J4.3 J4.None